# Altium PCB Controller-Board-Rev2.PcbDoc
Units mm, origin at the board's own origin, x right, y up, seen from the top; angles counter-clockwise.
Board outline 35 x 30 mm, 4 copper layers (Component Side, Ground Plane, Power Plane, Solder Side), stack 0.844 mm thick; 52 components, 56 nets, 236 pads, 62 vias.
Unrouted connection lines stored in the file: 54.
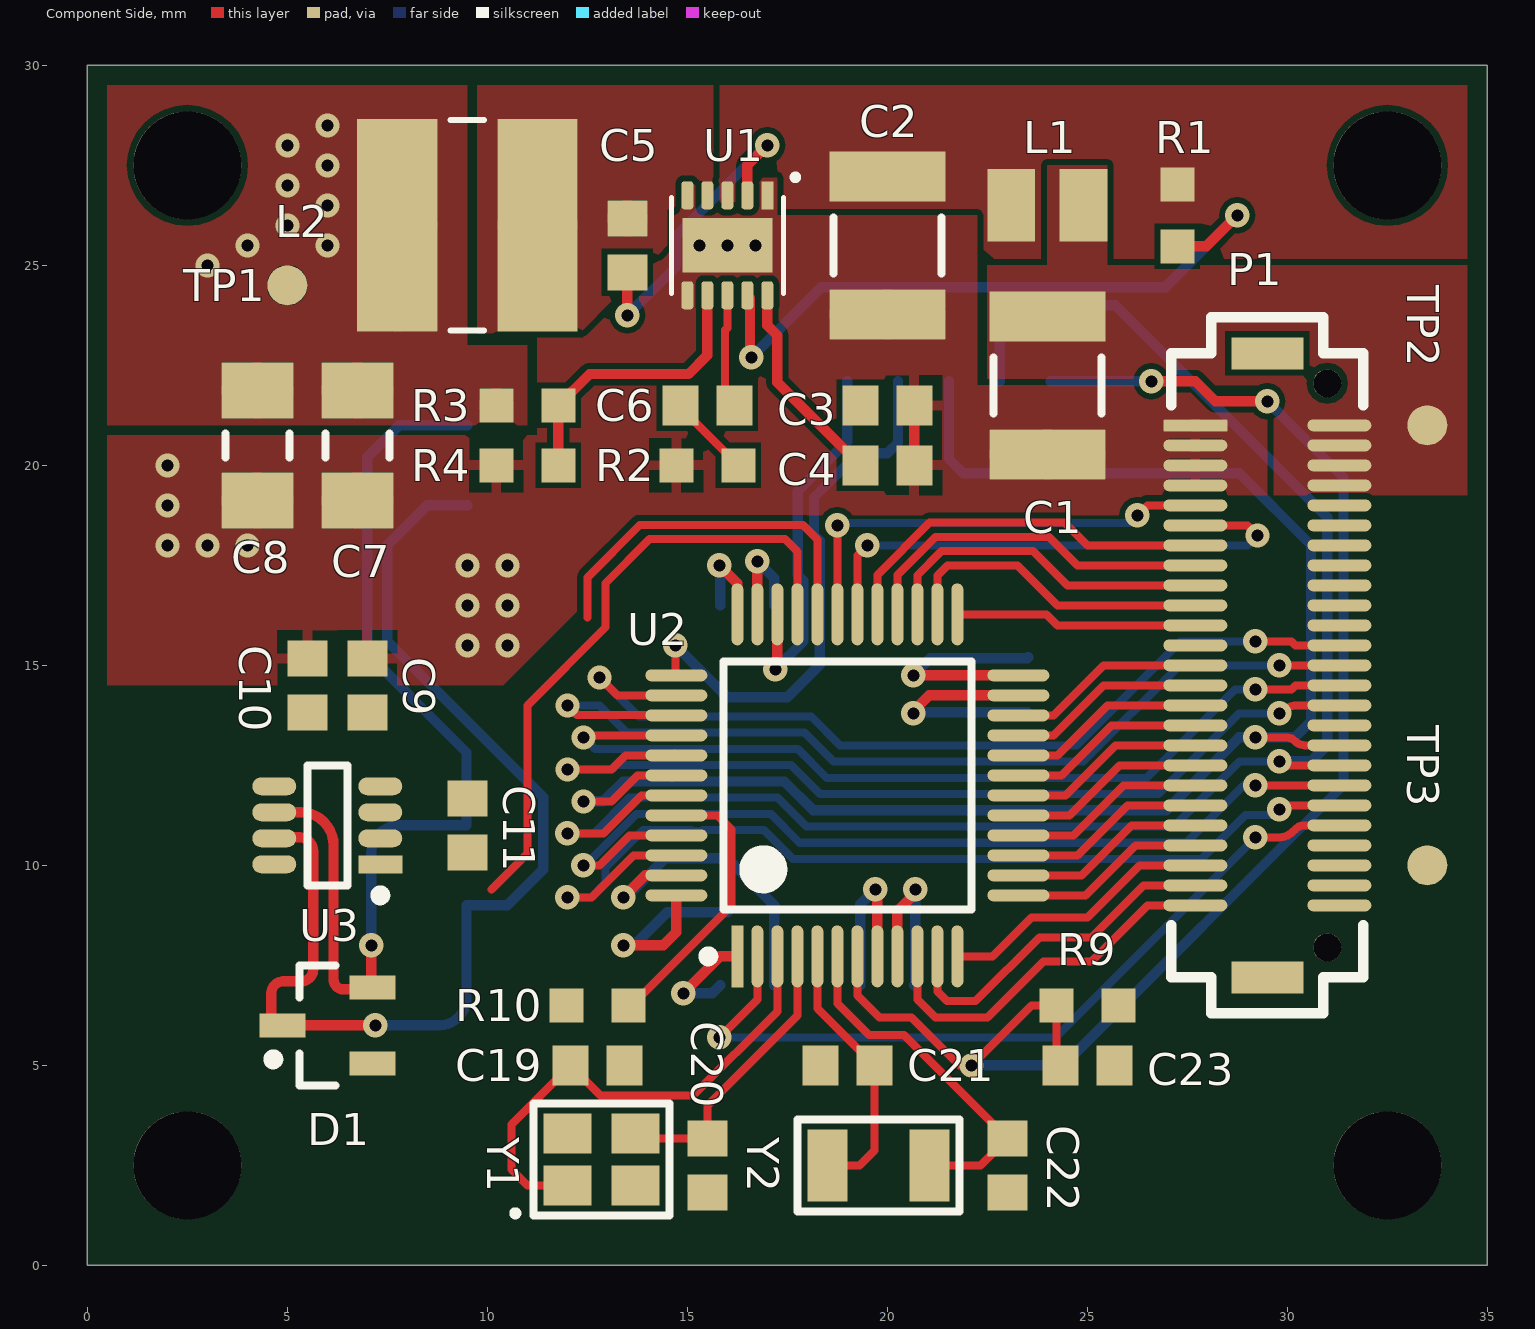
[diagram p0: Component Side view]
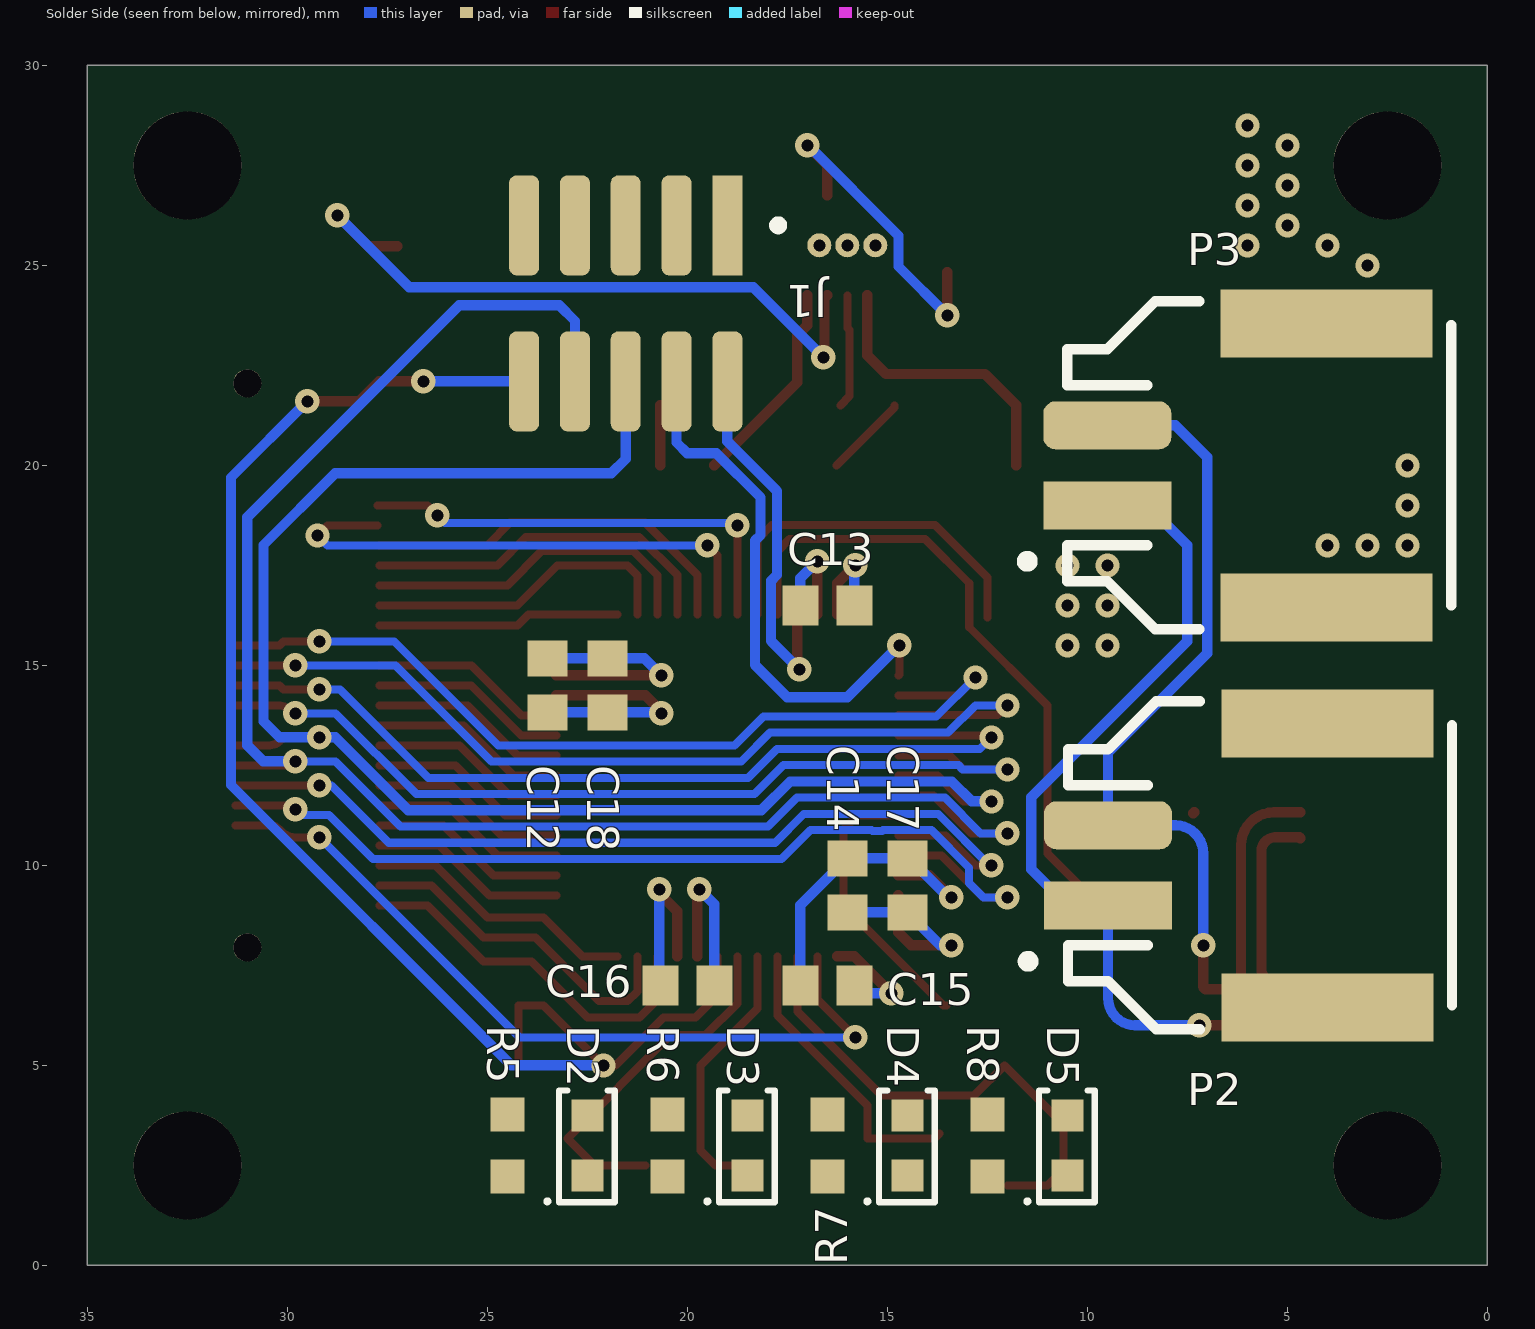
[diagram p1: Solder Side view, seen from below]
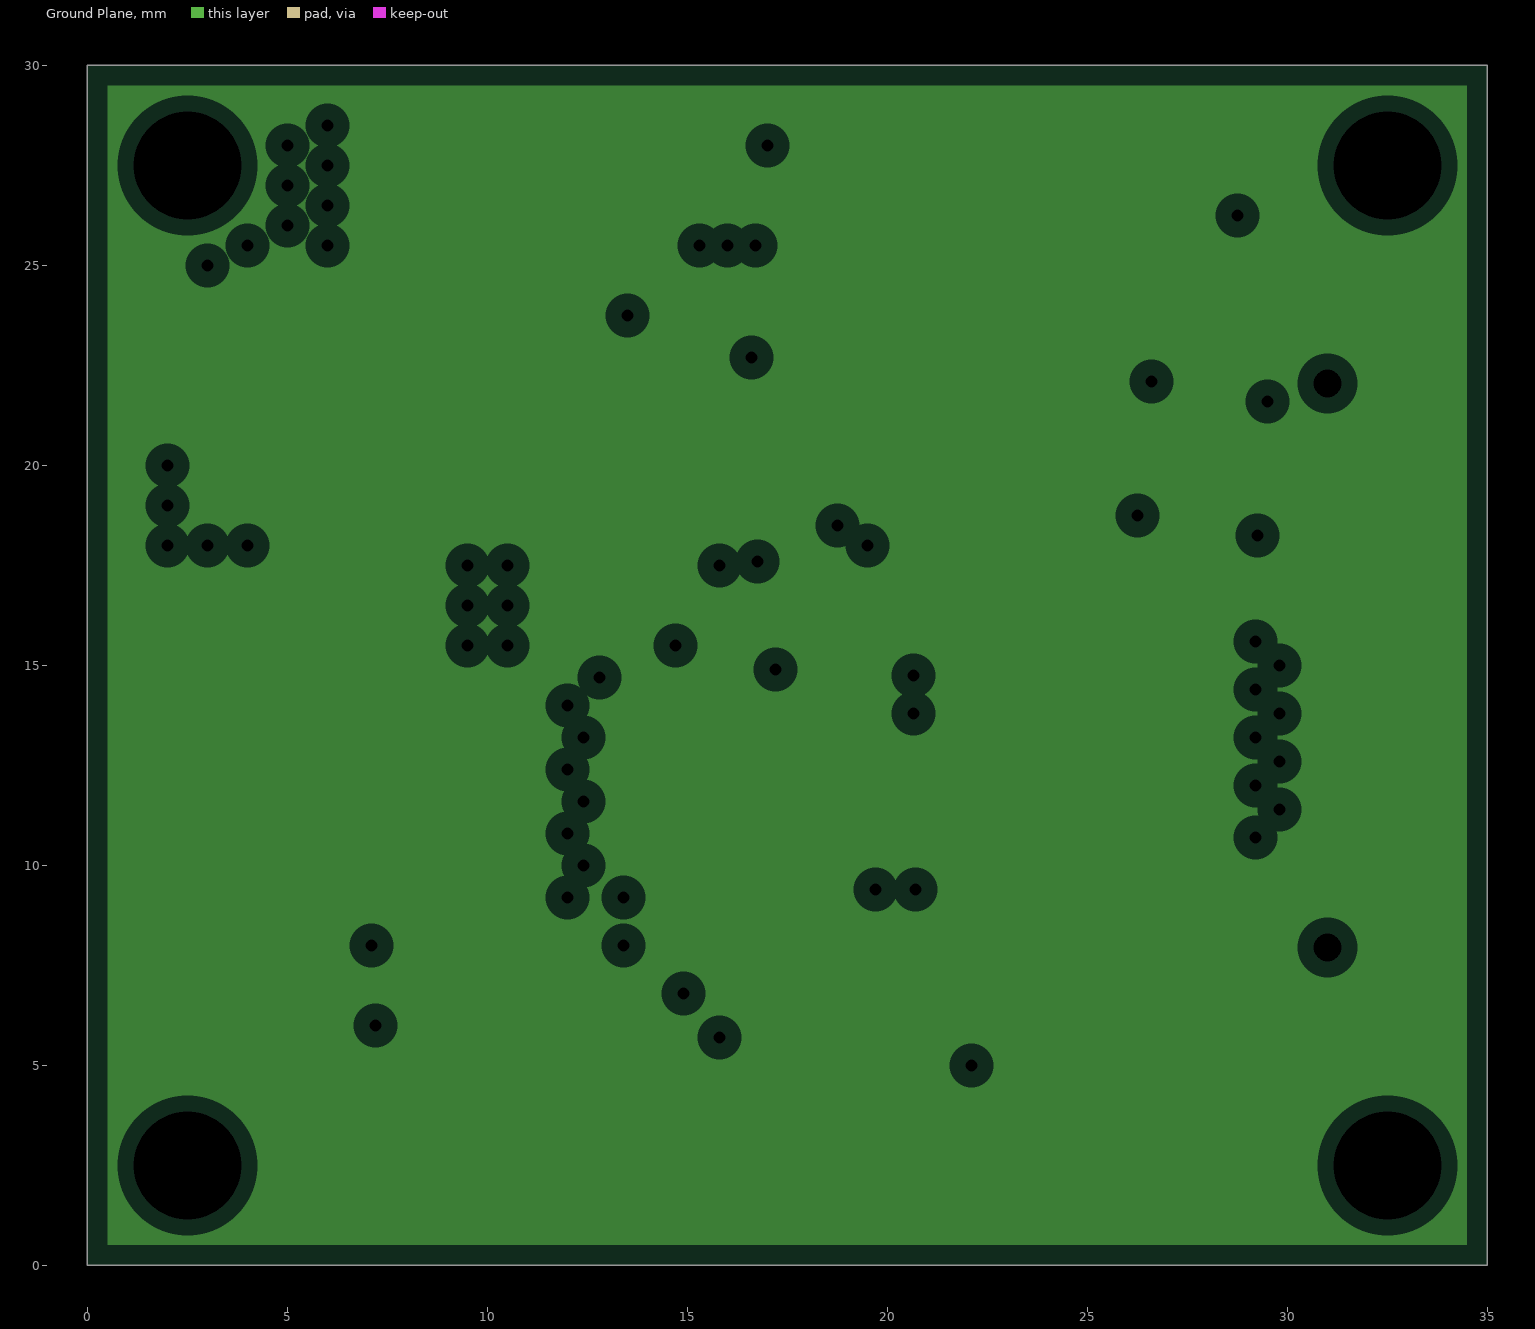
[diagram p2: Ground Plane, clearances drawn from the general rule]
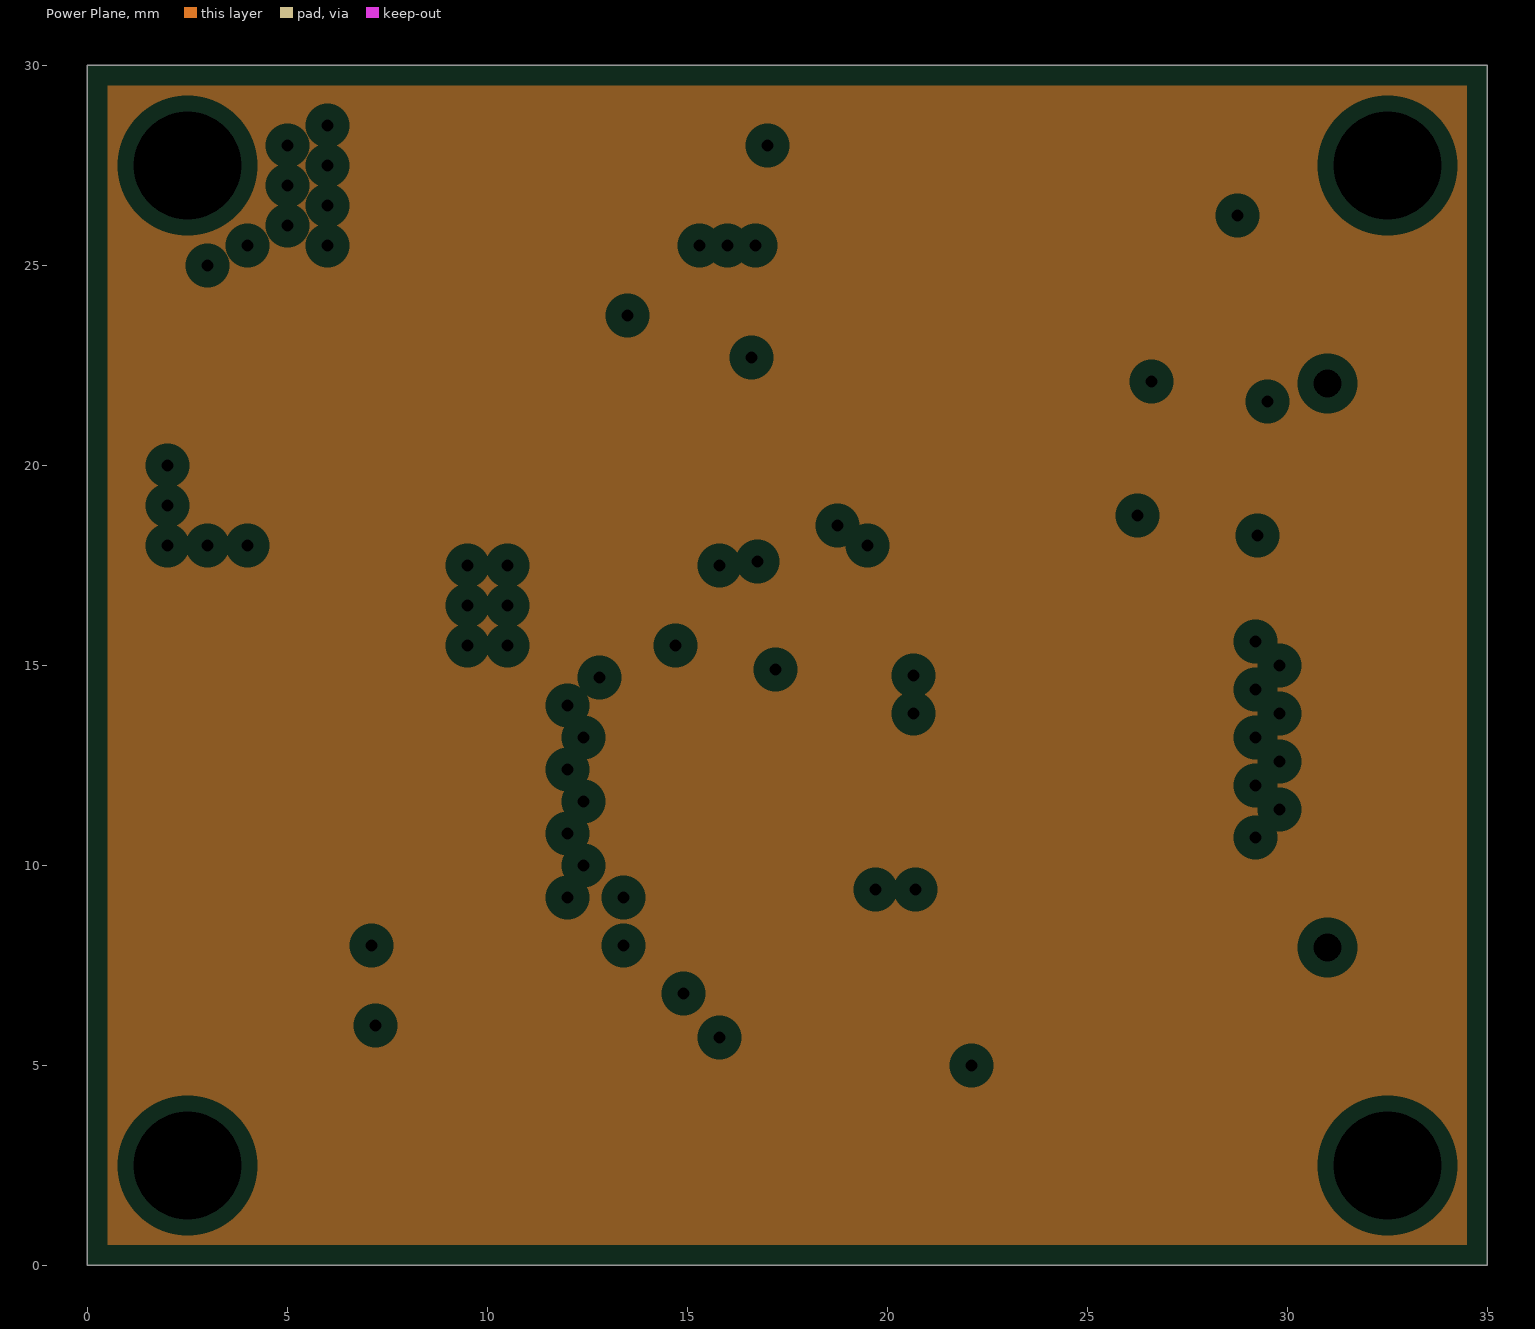
[diagram p3: Power Plane, clearances drawn from the general rule]
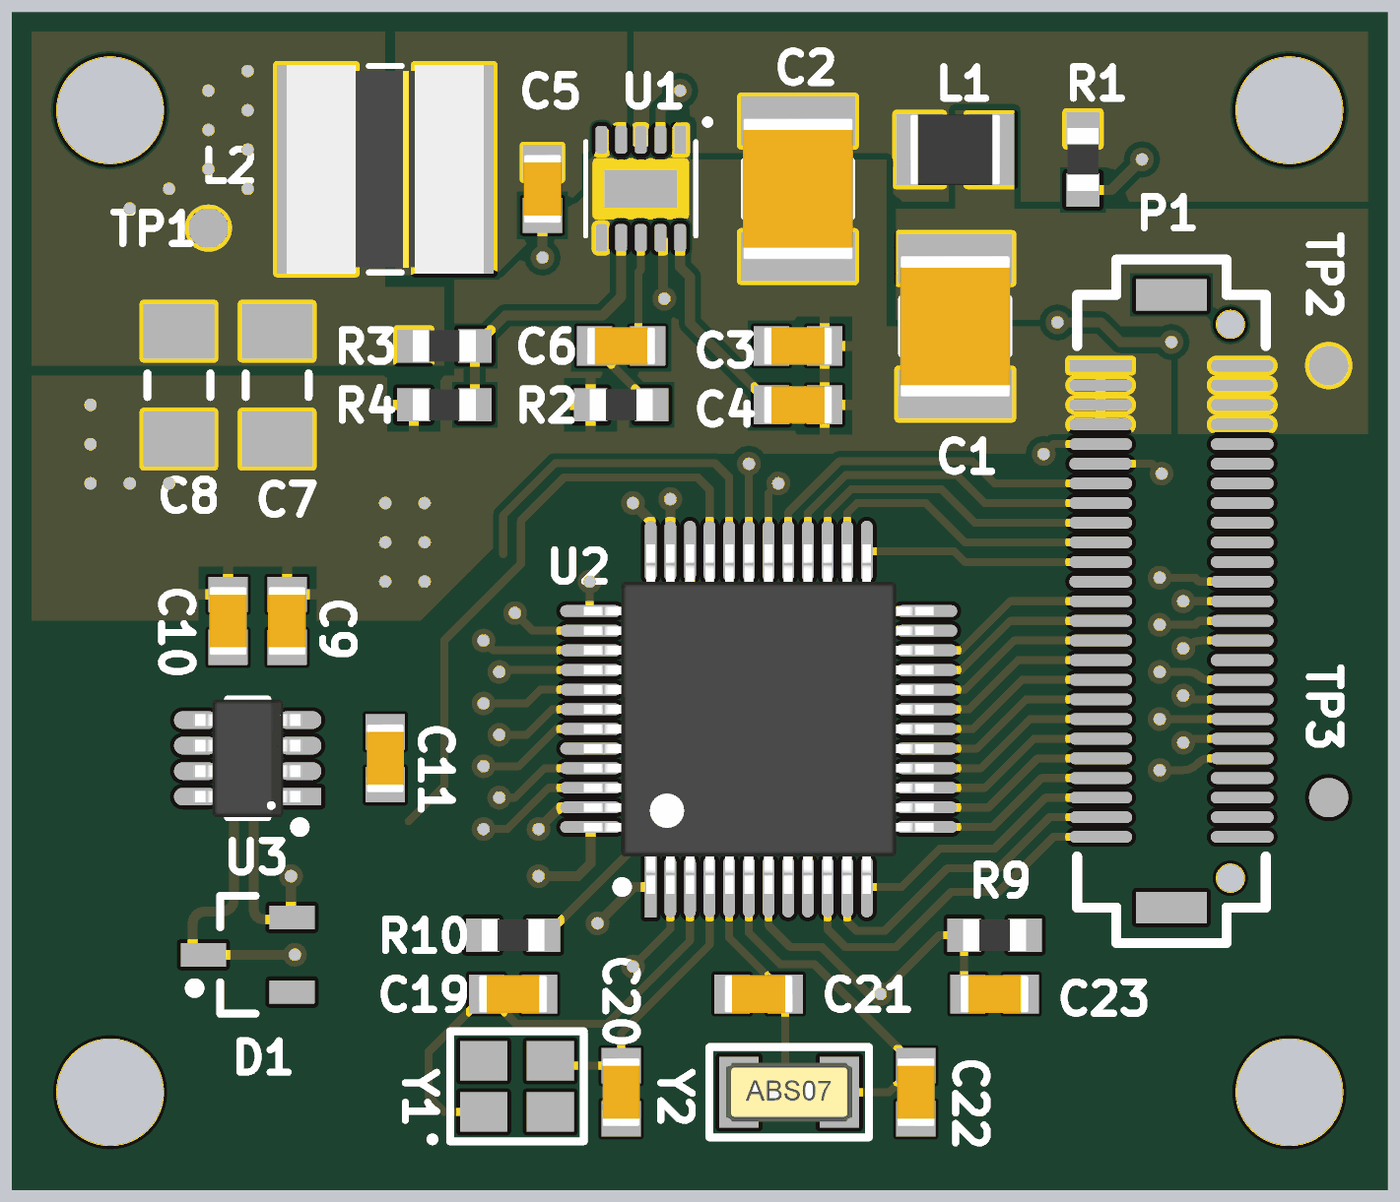
[diagram p4: 3D render of the assembled board from above, using the file's embedded part models]
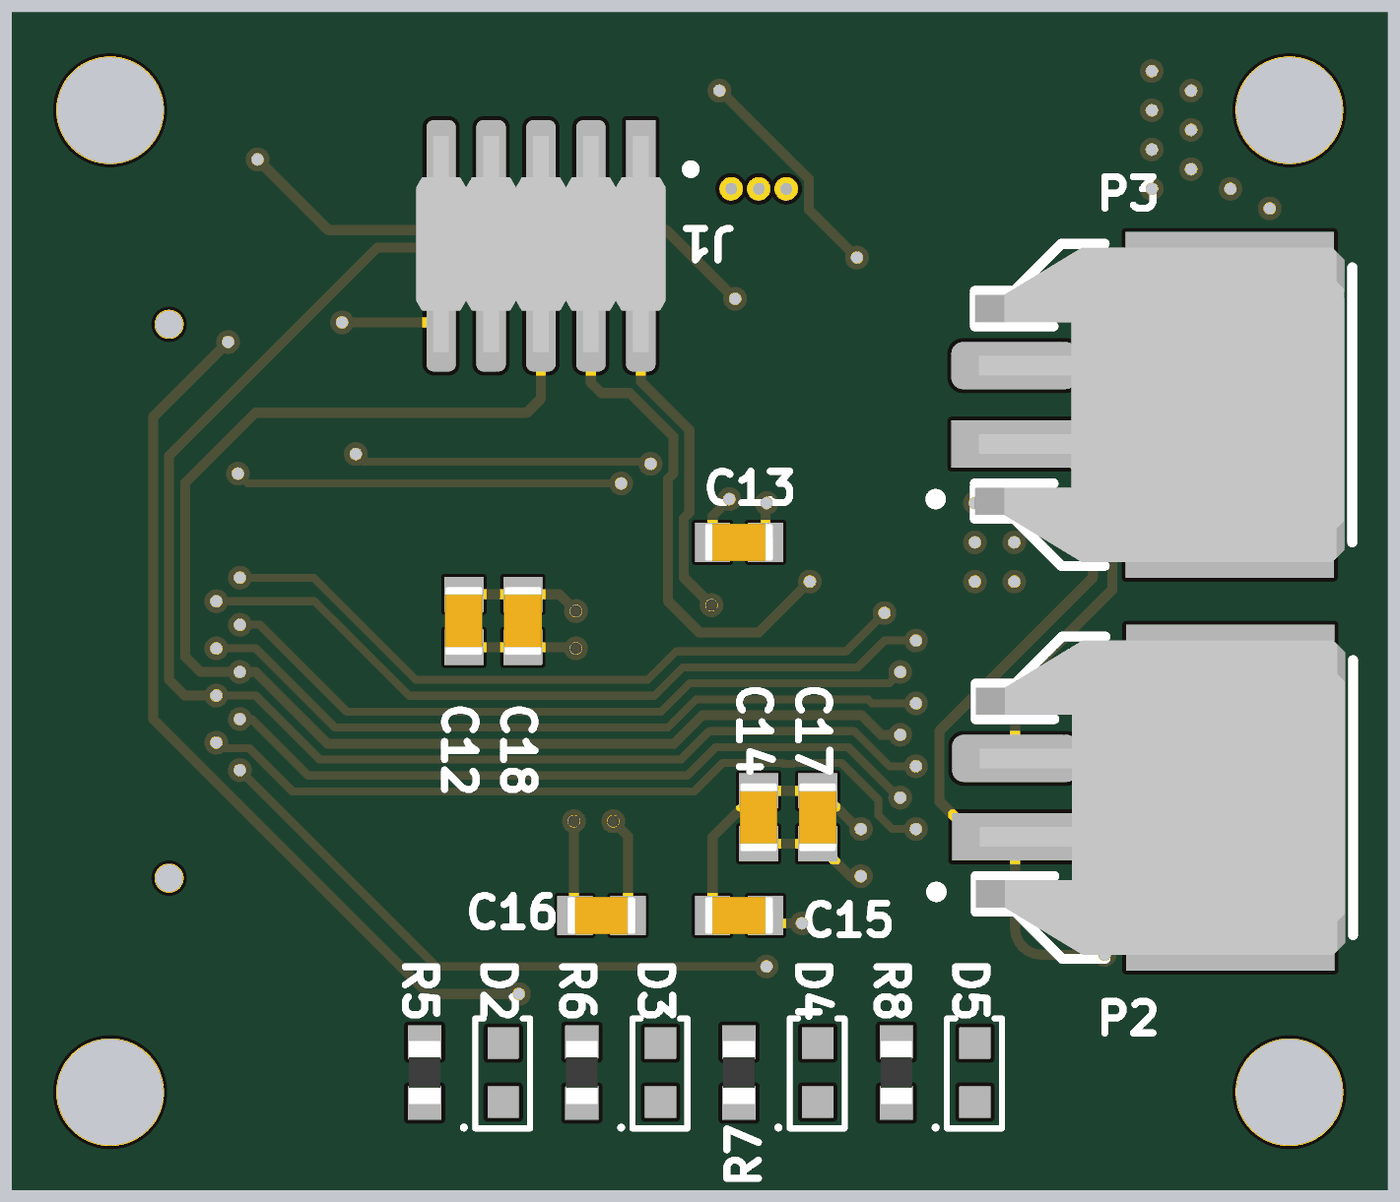
[diagram p5: 3D render of the assembled board from below, using the file's embedded part models]

## Layer stack, top to bottom
Top Solder: solder mask 0.0102, Solder Resist, Dk 3.5
Component Side: signal copper 0.0356
Dielectric 1: core 0.32, FR-4, Dk 4.8
Ground Plane: plane copper 0.036
Dielectric 3: prepreg 0.127, Dk 4.2
Power Plane: plane copper 0.036
Dielectric 4: core 0.254, Dk 4.2
Solder Side: signal copper 0.0356
Bottom Solder: solder mask 0.0102, Solder Resist, Dk 3.5

## Board outline
0,0 35,0 35,30 0,30

## Design rules (kind name [scope] priority, off if disabled: settings)
Clearance [All] p1: gap=0.152
DiffPairsRouting [All] p1: maxlimit=0.254 minlimit=0.254 mostfreqgap=0.254 toplayer_minwidth=0.254 toplayer_maxwidth=0.381 toplayer_prefwidth=0.254 bottomlayer_minwidth=0.254 bottomlayer_maxwidth=0.381 bottomlayer_prefwidth=0.254 maxuncoupledlength=25
PlaneClearance [All] p1: clearance=0.4
PlaneConnect [All] p1: planeconnectstyle=Direct reliefexpansion=0 reliefentries=4 reliefconductorwidth=0.254 reliefairgap=0.254
PolygonConnect [HasFootprint('10-UFDFN') vs IsNamedPolygon('TOP_GND_1')] p1: connectstyle=Direct reliefconductorwidth=0.254 reliefentries=4 polygonreliefangle="90 Angle" airgapwidth=0.254
PolygonConnect PolygonConnect_12V [InNet('12V')   OR InNet('12V_IN')] p2: connectstyle=Direct reliefconductorwidth=0.254 reliefentries=4 polygonreliefangle="90 Angle" airgapwidth=0.254
PolygonConnect PolygonConnect_GND_Via [IsVia vs InNet('GND')] p3: connectstyle=Direct reliefconductorwidth=0.254 reliefentries=4 polygonreliefangle="90 Angle" airgapwidth=0.254
PolygonConnect PolygonConnect_3V3_Via [IsVia vs InNet('3V3')] p4: connectstyle=Direct reliefconductorwidth=0.254 reliefentries=4 polygonreliefangle="90 Angle" airgapwidth=0.254
PolygonConnect PolygonConnect_Capacitor_GND_Pad [InNet('GND') vs HasFootprint('CAPC1608X06N')] p5: connectstyle=Relief reliefconductorwidth=0.254 reliefentries=4 polygonreliefangle="90 Angle" airgapwidth=0.254
PolygonConnect PolygonConnect_Resistor_GND_Pad [InNet('GND') vs HasFootprint('RESC1608X06N')] p6: connectstyle=Relief reliefconductorwidth=0.254 reliefentries=4 polygonreliefangle="90 Angle" airgapwidth=0.254
RoutingVias [All] p1: holewidth=0.3 width=0.605 viastyle="Through Hole" minholewidth=0.3 minwidth=0.605 maxholewidth=6.3 maxwidth=6.605
SolderMaskExpansion [All] p1: expansion=0.102
Width [All] p1: maxlimit=1.27 minlimit=0.152 preferedwidth=0.203
27 further rules are at their usual default settings.

## Classes and differential pairs
component class Controller_Board_Power_Supply: C1 C2 C3 C4 C5 C6 C7 C8 L1 L2 R1 R2 R3 R4 TP1 TP2 TP3 U1
differential pair CAN: +CAN_P -CAN_N

## Components (designator, comment, footprint, x,y, rotation, side; value= is the part's Value field where it differs from the comment)
C1 "22uF" CAPC3225X28M 24,22 r90 top
C2 "22uF" CAPC3225X28M 20,25.5 r90 top
C3 "0.1uF" CAPC1608X06N 20,21.5 r180 top
C4 "0.1uF" CAPC1608X06N 20,20 r0 top
C5 "10nF" CAPC1608X06N 13.5,25.5 r90 top
C6 "6800pF" CAPC1608X06N 15.5,21.5 r0 top
C7 "22uF" CAPC3216X18N 6.75,20.5 r90 top
C8 "22uF" CAPC3216X18N 4.25,20.5 r90 top
C9 "10uF" CAPC1608X06N 7,14.5 r270 top
C10 "4.7uF" CAPC1608X06N 5.5,14.5 r270 top
C11 "0.1uF" CAPC1608X06N 9.5,11 r90 top
C12 "0.1uF" CAPC1608X06N 23.5,14.5 r90 bottom
C13 "0.1uF" CAPC1608X06N 16.5,16.5 r180 bottom
C14 "0.1uF" CAPC1608X06N 16,9.5 r270 bottom
C15 "0.1uF" CAPC1608X06N 20,7 r0 bottom
C16 "0.1uF" CAPC1608X06N 16.5,7 r180 bottom
C17 "4.7uF" CAPC1608X06N 14.5,9.5 r270 bottom
C18 "4.7uF" CAPC1608X06N 22,14.5 r90 bottom
C19 "15pF" CAPC1608X06N 12.75,5 r180 top
C20 "15pF" CAPC1608X06N 15.5,2.5 r90 top
C21 "15pF" CAPC1608X06N 19,5 r0 top
C22 "15pF" CAPC1608X06N 23,2.5 r90 top
C23 "0.1uF" CAPC1608X06N 25,5 r180 top
D1 "TVS Diode" SOT23 6,6 r180 top
D2 "Blue" DIOC1608X06N 22.5,3 r90 bottom
D3 "Blue" DIOC1608X06N 18.5,3 r90 bottom
D4 "Green" DIOC1608X06N 14.5,3 r90 bottom
D5 "Red" DIOC1608X06N 10.5,3 r90 bottom
J1 "10 Position 0.05\" Header Surface Mount" "10 POS 1.27MM RECT CONN" 19,26 r0 bottom
L1 "560nH" INDC2116X06N 24,26.5 r180 top
L2 "15µH" IND_BOURNS_SRR40 9.5,26 r180 top
P1 "BergStak Receptacle" "Bergstak 50 Pos Receptacle" 29.5,15 r0 top
P2 "CAN" "2 POS Dura-Click" 9.48,9 r90 bottom
P3 "CAN" "2 POS Dura-Click" 9.5,19 r90 bottom
R1 "100K" RESC1608X06N 27.25,26.25 r270 top
R2 "6.8k" RESC1608X06N 15.5,20 r0 top
R3 "26.1K" RESC1608X06N 11,21.5 r180 top
R4 "10K" RESC1608X06N 11,20 r0 top
R5 "510R" RESC1608X06N 24.5,3 r90 bottom
R6 "510R" RESC1608X06N 20.5,3 r90 bottom
R7 "510R" RESC1608X06N 16.5,3 r90 bottom
R8 "510R" RESC1608X06N 12.5,3 r90 bottom
R9 "100K" RESC1608X06N 25,6.5 r0 top
R10 "510R" RESC1608X06N 12.75,6.5 r0 top
TP1 "Test Point" "Test Point" 5,24.5 r90 top
TP2 "Test Point" "Test Point" 33.5,21 r90 top
TP3 "Test Point" "Test Point" 33.5,10 r90 top
U1 "AP65200FK-7 Buck Switching Regulator" 10-UFDFN 16,25.5 r180 top
U2 "STM32F072CBT6_QFP" TSQFP50P890X890X160-48M 19,12 r90 top
U3 "TCAN332DR CAN Transceiver_SOT" TSOP65P280X145-8N 6,11 r180 top
Y1 "CRYSTAL 32 MHz 4-SMD" "CX2520DB CRYSTAL" 12,2 r0 top
Y2 "32.768 kHz" "ABS07AIG CRYSTAL" 18.5,2.5 r0 top

## Footprints (in the part's own frame and the unit in brackets; to place one, negate y for a bottom-side part, rotate by r counter-clockwise, add the part's x,y. Pads: shape width x height; smd on the part's side, far side on the other; paste and mask are expansions set on the pad)
"2 POS Dura-Click" [mm] "WM7169CT-ND"
  rect 1.2x3.2 smd: 1(0,0)
  rrect50% 1.2x3.2 smd: 2(2,0)
  rect 1.7x5.3 smd: ""(-2.55,-5.48) ""(4.55,-5.48)
  silkscreen extent -3.1,-8.6 5.1,2.13, body extent -3,-8.4 5,1, height 6.39
"10 POS 1.27MM RECT CONN" [mm] "Amphenol 10 Positions Header Connector 0.050\" (1.27mm) Surface Mount Gold"
  rect 0.75x2.5 smd: 1(0,0)
  rrect50% 0.75x2.5 smd: 2(0,3.9) 3(1.27,0) 4(1.27,3.9) 5(2.54,0) 6(2.54,3.9) 7(3.81,0) 8(3.81,3.9) 9(5.08,0) 10(5.08,3.9)
  silkscreen extent -1.37,-0.1 -1.17,0.1, body extent -0.64,-0.84 5.72,4.65, height 4.5
10-UFDFN [mm]
  rect 0.3x0.7 smd: 1(-1,-1.25)
  rrect50% 0.3x0.7 smd: 2(-0.5,-1.25) 3(0,-1.25) 4(0.5,-1.25) 5(1,-1.25) 6(1,1.25) 7(0.5,1.25) 8(0,1.25) 9(-0.5,1.25) 10(-1,1.25)
  round 0.6 hole 0.3: 11(-0.7,0) 11(0,0) 11(0.7,0)
  rect 2.25x1.36 smd paste-0.2: 11(0,0)
  silkscreen extent -1.77,-1.77 1.4,1.2, body extent -1.27,-1.27 1.28,1.28, height 0.6
"ABS07AIG CRYSTAL" [mm]
  rect 1x1.8 smd: 1(0,0) 2(2.55,0)
  silkscreen extent -0.75,-1.15 3.3,1.15, body extent -0.33,-0.75 2.88,0.75, height 0.89
"Bergstak 50 Pos Receptacle" [mm] "Bergstak 50 Position Receptacle"
  rect 1.6x0.3 smd: 1(-1.8,6)
  oval 1.6x0.3 smd: 2(-1.8,5.5) 3(-1.8,5) 4(-1.8,4.5) 5(-1.8,4) 6(-1.8,3.5) 7(-1.8,3) 8(-1.8,2.5) 9(-1.8,2) 10(-1.8,1.5) 11(-1.8,1) 12(-1.8,0.5) 13(-1.8,0) 14(-1.8,-0.5) 15(-1.8,-1) 16(-1.8,-1.5) 17(-1.8,-2) 18(-1.8,-2.5) 19(-1.8,-3) 20(-1.8,-3.5) 21(-1.8,-4) 22(-1.8,-4.5) 23(-1.8,-5) 24(-1.8,-5.5) 25(-1.8,-6) 26(1.8,-6) 27(1.8,-5.5) 28(1.8,-5) 29(1.8,-4.5) 30(1.8,-4) 31(1.8,-3.5) 32(1.8,-3) 33(1.8,-2.5) 34(1.8,-2) 35(1.8,-1.5) 36(1.8,-1) 37(1.8,-0.5) 38(1.8,0) 39(1.8,0.5) 40(1.8,1) 41(1.8,1.5) 42(1.8,2) 43(1.8,2.5) 44(1.8,3) 45(1.8,3.5) 46(1.8,4) 47(1.8,4.5) 48(1.8,5) 49(1.8,5.5) 50(1.8,6)
  rect 1.8x0.8 smd: ""(0,-7.8) ""(0,7.8)
  round 0.7 hole 0.7: ""(1.5,-7.05) ""(1.5,7.05)
  silkscreen extent -2.4,-8.7 2.4,8.7
CAPC1608X06N [mm] "Chip Capacitor, 2-Leads, Body 1.60x0.81mm, IPC Medium Density"
  rect 0.9x1 smd mask+0.076: 1(-0.675,0) 2(0.675,0)
  body extent -0.87,-0.48 0.87,0.48, height 0.9
CAPC3216X18N [mm] "Chip Capacitor, 2-Leads, Body 3.20x1.60mm, IPC Medium Density"
  rect 1.4x1.8 smd: 1(-1.375,0) 2(1.375,0)
  silkscreen extent -0.3,-0.8 0.3,0.8, body extent -1.68,-0.87 1.67,0.87, height 1.8
CAPC3225X28M [mm] "Chip Capacitor, 2-Leads, Body 3.20x2.50mm, IPC Low Density"
  rect 1.25x2.9 smd: 1(-1.725,0) 2(1.725,0)
  silkscreen extent -0.7,-1.35 0.7,1.35, body extent -1.8,-1.4 1.8,1.4, height 2.8
"CX2520DB CRYSTAL" [mm]
  rect 1.2x1 smd: 1(0,0) 2(1.7,0) 3(1.7,1.3) 4(0,1.3)
  silkscreen extent -1.35,-0.75 2.55,2.05, body extent -0.4,-0.35 2.1,1.65, height 0.5
DIOC1608X06N [mm] "Chip Diode, 2-Leads, Body 1.60x0.80mm, IPC Medium Density"
  rect 0.8x0.8 smd: 1(-0.75,0) 2(0.75,0)
  silkscreen extent -1.45,-0.69 1.38,1.05, body extent -0.8,-0.4 0.8,0.4, height 0.8
IND_BOURNS_SRR40 [mil]
  rect 79x209 smd: 1(-69,0) 2(69,0)
  silkscreen extent -16,-104 16,103, body extent -99,-105 99,105, height 79
INDC2116X06N [mm] "Chip Inductor, 2-Leads, Body 2.10x1.60mm, IPC Medium Density"
  rect 1.19x1.82 smd: 1(-0.905,0) 2(0.905,0)
  body extent -1.15,-0.9 1.15,0.9, height 0.6
RESC1608X06N [mm] "Chip Resistor, 2-Leads, Body 1.60x0.80mm, IPC Medium Density"
  rect 0.85x0.85 smd: 1(-0.775,0) 2(0.775,0)
  body extent -0.8,-0.4 0.8,0.4, height 0.55
SOT23 [mm] "SOT23, 3-Leads, Body 2.9x1.3mm, Pitch 0.95mm, Lead Span 2.3mm - Reverse Pinning, IPC Medium Density"
  rect 1.15x0.6 smd: 1(1.125,0) 2(-1.125,-0.95) 3(-1.125,0.95)
  silkscreen extent -0.2,-1.5 1.47,1.5, body extent -0.7,-1.5 0.7,1.5, height 1.1
"Test Point" [mm]
  round 1 smd: TP(0,0)
TSOP65P280X145-8N [mm] "TSOP, 8-Leads, Body 2.90x1.60mm, Pitch 0.65mm, IPC Medium Density"
  rect 1.1x0.45 smd: 1(-1.325,0.975)
  oval 1.1x0.45 smd: 2(-1.325,0.325) 3(-1.325,-0.325) 4(-1.325,-0.975) 5(1.325,-0.975) 6(1.325,-0.325) 7(1.325,0.325) 8(1.325,0.975)
  silkscreen extent -1.45,-1.5 0.5,1.87, body extent -1.39,-1.5 1.39,1.5, height 1.45
TSQFP50P890X890X160-48M [mm] "TSQFP, 48-Leads, Body 7.00x7.00mm, Pitch 0.50mm, IPC Low Density"
  rect 1.55x0.3 smd: 1(-4.275,2.75)
  oval 1.55x0.3 smd: 2(-4.275,2.25) 3(-4.275,1.75) 4(-4.275,1.25) 5(-4.275,0.75) 6(-4.275,0.25) 7(-4.275,-0.25) 8(-4.275,-0.75) 9(-4.275,-1.25) 10(-4.275,-1.75) 11(-4.275,-2.25) 12(-4.275,-2.75) 25(4.275,-2.75) 26(4.275,-2.25) 27(4.275,-1.75) 28(4.275,-1.25) 29(4.275,-0.75) 30(4.275,-0.25) 31(4.275,0.25) 32(4.275,0.75) 33(4.275,1.25) 34(4.275,1.75) 35(4.275,2.25) 36(4.275,2.75)
  oval 0.3x1.55 smd: 13(-2.75,-4.275) 14(-2.25,-4.275) 15(-1.75,-4.275) 16(-1.25,-4.275) 17(-0.75,-4.275) 18(-0.25,-4.275) 19(0.25,-4.275) 20(0.75,-4.275) 21(1.25,-4.275) 22(1.75,-4.275) 23(2.25,-4.275) 24(2.75,-4.275) 37(2.75,4.275) 38(2.25,4.275) 39(1.75,4.275) 40(1.25,4.275) 41(0.75,4.275) 42(0.25,4.275) 43(-0.25,4.275) 44(-0.75,4.275) 45(-1.25,4.275) 46(-1.75,4.275) 47(-2.25,4.275) 48(-2.75,4.275)
  silkscreen extent -4.4,-3.1 3.1,3.6, body extent -4.45,-4.45 4.45,4.45, height 1.6

## Part data
C1 C2: library part "CAP CER 22UF 16V X5R 1210", "22µF ±20% 16V Ceramic Capacitor X5R 1210 (3225 Metric)"
C3 C4 C11 C12 C13 C14 C15 C16 C23: library part "CAP CER 0.1UF 50V 10% X7R 0603", "0.10µF ±10% 50V Ceramic Capacitor X7R 0603 (1608 Metric)"
C5: library part "CAP CER 10nF 50V 5% X7R 0603", "10000pF ±5% 50V Ceramic Capacitor U2J 0603 (1608 Metric)"
C6: library part "CAP CER 6800pF 50V 10% X7R 0603", "6800pF ±10% 50V Ceramic Capacitor X7R 0603 (1608 Metric)"
C7 C8: library part "CAP CER 22UF 6.3V X7R 1206", "22µF ±10% 6.3V Ceramic Capacitor X7R 1206 (3216 Metric)"
C9: library part "CAP CER 10uF 25V 20% X5R 0603", "10µF ±20% 25V Ceramic Capacitor X5R 0603 (1608 Metric)"
C10 C17 C18: library part "CAP CER 4.7UF 25V 10% X5R 0603", "4.7µF ±10% 25V Ceramic Capacitor X5R 0603 (1608 Metric)"
C19 C20 C21 C22: library part "CAP CER 15PF 50V NPO 0603", "15pF ±5% 50V Ceramic Capacitor C0G, NP0 0603 (1608 Metric)"
D1: "TVS DIODE 24VWM 70VC SOT23"
D2 D3: library part LED_BLUE, "LED BLUE CLEAR 0603 SMD"
D4: library part LED_GREEN, "LED GREEN CLEAR 0603 SMD"
D5: library part LED_RED, "Red LED 0603"
J1: "10 Positions Header Connector 0.050\" (1.27mm) Surface Mount Gold"
L1: library part "IND 560NH 2.1A 80 MOHM SMD", "560nH Shielded Multilayer Inductor 2.1A 80 mOhm Max 0806 (2016 Metric)"
L2: library part "IND 15UH 1.03A 220 MOHM", "15µH Shielded Wirewound Inductor 1.03A 220 mOhm Max 1919 (4848 Metric)"
P1: library part "BergStak 50 Position Connector Receptacle", "50 Position Connector Receptacle, Center Strip Contacts Surface Mount Gold"
P2 P3: library part "2 Position DuraClik CAN Connector", "2 Positions Header, Shrouded Connector 0.079\" (2.00mm) Surface Mount, Right Angle Tin"
R1 R9: library part "RES 100K OHM 1/8W 5% 0603 SMD", "RES SMD 100K OHM 5% 1/10W 0603"
R2: library part "RES 6.8k OHM 1% 1/10W 0603 SMD", "RES SMD 6.8K OHM 1% 1/10W 0603"
R3: library part "RES 26.1K OHM 1/10W 1% 0603 SMD", "RES SMD 26.1K OHM 1% 1/10W 0603"
R4: library part "RES SMD 10K OHM 1% 1/10W 0603", "RES SMD 10K OHM 1% 1/10W 0603"
R5 R6 R7 R8 R10: library part "RES 510 OHM 1/10W 0603 SMD", "RES SMD 510 OHM 5% 1/10W 0603"
U1: "Buck Switching Reg IC Positive Adjustable 0.925V 1 Output 2A 10-UFDFN Exposed Pad"
U3: "1/1 Transceiver CAN 8-SOIC"
Y1: "32MHz ±15ppm Crystal 8pF 50 Ohm -40°C ~ 85°C AEC-Q200 Surface Mount 4-SMD, No Lead"
Y2: library part "CRYSTAL 32.768KHZ 9PF 2-SMD", "32.768kHz ±20ppm Crystal 6pF 50 kOhm -40°C ~ 85°C Surface Mount 4-SOJ, 5.50mm pitch"

## Free pads (board coordinates)
  round 2.7 hole 2.7: ""(2.5,2.5) ""(2.5,27.5) ""(32.5,2.5) ""(32.5,27.5)

## Via types
v1: diameter 0.605, hole 0.3, Component Side to Solder Side, tented both sides, 35 vias
v2: diameter 0.6, hole 0.3, Component Side to Solder Side, tented both sides, 27 vias

## Nets (pads, with @x,y where several pads share a name; then routed paths per layer and width w, separated by ;. In a path a pad name is that pad's centre, name@x,y a point inside that pad or via, vN(x,y) a via of type N, cw(c..) or ccw(c..) an arc to the next point about the centre after c; other vN are vias at no path point)
3V3: C7.2 C8.2 C9.2 C10.2 C11.2 C12.2 C13.2 C14.2 C15.2 C16.2 C17.2 C18.2 J1.1 L2.2 P1.40 P1.41 P1.42 P1.43 P1.44 P1.45 R3.2 R5.1 R6.1 R7.1 R8.1 R9.2 TP1.TP U2.1 U2.9 U2.24 U2.36 U2.48 U3.3 | length 20.6
  Component Side w0.254: U3.3 U3.3@7.35,11.3 ; v1(13.4,8) 14.4,8 14.725,8.325 U2.48 ; v1(14.9,6.8) 15.825,7.725 U2.1 ; v1(15.8,17.5) 16.25,17.05 U2.36 ; U2.9 20.25,8.85 20.7,9.3 v1(20.7,9.4) ; v1(20.65,14.75) U2.24
  Solder Side w0.254: v1(13.4,8) 13.675,8 C17.2 C14.2 ; v1(14.9,6.8) 15.625,6.8 C16.2 ; C13.2 v1@15.825,17.625 ; v1(20.65,14.75) 21.075,15.175 C18.2 C12.2 C12.2@23.525,15.2 ; C15.2 20.7,7.025 v1(20.7,9.4)
  other v2: 3,25 4,25.5 6,25.5 5,26 6,26.5 5,27 6,27.5 5,28 6,28.5
12V: C1.2 L1.1 P1.47 P1.48 P1.49 P1.50 TP2.TP
12V_IN: C2.2 C3.2 L1.2 R1.1 U1.3
BOOT0: R10.2 U2.44 | length 7
  Component Side w0.203: R10.2 13.6,6.5 16.1,9 16.1,10.9 15.75,11.25 U2.44
BST: C5.1 U1.2 | length 8.2
  Component Side w0.254: v1(13.5,23.75) C5.1 ; U1.2 16.5,27.5 v1(17,28)
  Solder Side w0.254: v1(13.5,23.75) 14.721,24.971 14.721,25.74 16.981,28 v1(17,28)
CAN_N: D1.2 P2.2 P3.2 U3.6 | length 25.6
  Component Side w0.254: U3.6 5.335,11.325 cw(c5.335,10.503) 6.157,10.503 6.157,7.143 ccw(c6.4,7.143) 6.4,6.9 7.025,6.9 ccw(c7.025,6.975) 7.1,6.975 v1(7.1,8)
  Solder Side w0.254: v1(7.1,8) 7.1,10.3 cw(c7.8,10.3) 7.8,11 P2.2 9.48,12.82 7,15.3 7,20.2 7.8,21 P3.2
CAN_P: D1.1 P2.1 P3.1 U3.7 | length 28.3
  Component Side w0.254: U3.7 cw(c4.7,10.675) 4.7,10.7 5.3,10.7 cw(c5.3,10.351) 5.649,10.351 5.649,7.4 cw(c5.349,7.4) 5.349,7.1 4.9,7.1 ccw(c4.9,6.8) 4.6,6.8 4.6,6 D1.1 v1(7.2,6)
  Solder Side w0.254: v1(7.2,6) 8.8,6 ccw(c8.8,6.68) 9.48,6.68 P2.1 10.5,9 11.4,9.9 11.4,11.7 7.5,15.6 7.5,18 8.5,19 P3.1
COMP: C6.2 U1.8 | length 2.9
  Component Side w0.203: U1.8 16,23.437 15.944,23.381 15.944,21.731 C6.2
EN: R1.2 U1.9 | length 17
  Component Side w0.254: U1.9 16.571,24.179 16.571,22.729 v1(16.6,22.7) ; R1.2 27.975,25.475 v1(28.75,26.25)
  Solder Side w0.254: v1(16.6,22.7) 18.35,24.45 26.95,24.45 v1(28.75,26.25)
FB: R3.1 R4.2 U1.7 | length 7.2
  Component Side w0.254: R4.2 R3.1 12.554,22.279 15.029,22.279 15.5,22.75 U1.7
GND: C1.1 C2.1 C3.1 C4.2 C7.1 C8.1 C9.1 C10.1 C11.1 C12.1 C13.1 C14.1 C15.1 C16.1 C17.1 C18.1 C19.1 C20.1 C21.1 C22.1 C23.1 D1.3 J1.3 J1.5 P1.1 P1.2 P1.3 P1.4 P1.26 P1.27 P1.28 P1.29 R2.1 R4.1 R10.1 TP3.TP U1.1 U1.5 U1.6 U1.11 U2.8 U2.23 U2.35 U2.47 U3.2 Y1.2 Y1.4 | length 22.4
  Component Side w0.254: v1(13.4,9.2) 13.95,9.75 U2.47 ; U2.35 v1(16.75,17.6) ; v1(19.7,9.4) 19.75,9.35 U2.8 ; v1@20.6,13.8 21.05,14.25 U2.23 ; C4.2 C3.1
  Solder Side w0.254: v1(13.4,9.2) 13.475,9.2 14.475,10.2 C17.1 C14.1 17.175,9 C16.1 ; v1(16.75,17.6) 17.175,17.175 C13.1 ; C15.1 19.325,9.025 v1(19.7,9.4) ; v1@20.6,13.8 20.625,13.825 C18.1 C12.1
  other v1: 20.65,13.8
  other v2: 9.5,15.5 10.5,15.5 9.5,16.5 10.5,16.5 9.5,17.5 10.5,17.5 2,18 3,18 4,18 2,19 2,20
NetC6_1: C6.1 R2.2 | length 2.1
  Component Side w0.203: C6.1 14.825,21.45 R2.2
NetD2_1: D2.1 R5.2
NetD3_1: D3.1 R6.2
NetD4_1: D4.1 R7.2
NetD5_1: D5.1 R8.2
NRST: C23.2 J1.10 R9.1 U2.7 | length 37.1
  Component Side w0.203: U2.7 19.25,6.75 19.8,6.2 20.6,6.2 21.8,5 v2(22.1,5) 23.6,6.5 R9.1 24.225,5.1 C23.2
  Component Side w0.254: v1(26.6,22.1) 27.7,22.1 28.2,21.6 v1(29.5,21.6)
  Solder Side w0.254: v2(22.1,5) 24.4,5 31.406,12.006 31.406,19.694 v1(29.5,21.6) ; J1.10 v1(26.6,22.1)
PA0: P1.25 U2.10 | length 9.4
  Component Side w0.203: U2.10 20.75,6.65 21.2,6.2 22.5,6.2 23.9,7.6 25.1,7.6 26.5,9 P1.25
PA1: P1.24 U2.11 | length 8.6
  Component Side w0.203: U2.11 21.25,6.85 21.492,6.608 22.208,6.608 23.8,8.2 25.1,8.2 26.4,9.5 P1.24
PA2/USART2_TX: P1.23 U2.12 | length 6.9
  Component Side w0.203: U2.12 22.625,7.725 23.6,8.7 25,8.7 26.3,10 P1.23
PA3/USART2_RX: P1.22 U2.13 | length 4.9
  Component Side w0.203: U2.13 24.95,9.25 26.2,10.5 P1.22
PA4/SPI1_NSS: P1.21 U2.14 | length 4.9
  Component Side w0.203: U2.14 24.85,9.75 26.1,11 P1.21
PA5/SPI1_SCK: P1.20 U2.15 | length 4.9
  Component Side w0.203: U2.15 24.75,10.25 26,11.5 P1.20
PA6/SPI1_MISO: P1.19 U2.16 | length 4.9
  Component Side w0.203: U2.16 24.65,10.75 25.9,12 P1.19
PA7/SPI1_MOSI: P1.18 U2.17 | length 4.9
  Component Side w0.203: U2.17 24.55,11.25 25.8,12.5 P1.18
PA8: P1.7 U2.29 | length 9.7
  Component Side w0.203: U2.29 19.75,17.258 21.058,18.566 24.434,18.566 25,18 P1.7
PA9: P1.6 U2.30 | length 13.3
  Component Side w0.203: U2.30 19.25,17.75 v1(19.5,18) ; P1.6@27.75,18.5 29,18.5 v2(29.25,18.25)
  Solder Side w0.203: v1(19.5,18) 29,18 v2(29.25,18.25)
PA10: P1.5 U2.31 | length 11.4
  Component Side w0.203: U2.31 v1(18.75,18.5) ; v1(26.25,18.75) 26.5,19 P1.5 P1.5@27.75,19
  Solder Side w0.203: v1(18.75,18.5) 18.806,18.556 26.056,18.556 v1(26.25,18.75)
PA11/CAN_RX: U2.32 U3.4 | length 9.3
  Component Side w0.203: 12.5,16.2 12.5,17.2 13.812,18.512 17.888,18.512 18.25,18.15 U2.32
PA12/CAN_TX: U2.33 U3.1 | length 15.8
  Component Side w0.203: 10.1,9.4 11,10.3 11,14 12.951,15.951 12.951,17.051 14.056,18.156 17.444,18.156 17.75,17.85 U2.33
PA13/SWDIO: J1.2 U2.34 | length 9.5
  Component Side w0.254: v1(17.2,14.9) 17.25,14.95 U2.34
  Solder Side w0.254: v1(17.2,14.9) 17.904,15.604 17.904,17.116 17.762,17.258 17.762,19.362 19,20.6 J1.2
PA14/SWCLK: J1.4 U2.37 | length 13.7
  Component Side w0.203: v1(14.7,15.5) 14.7,14.775 U2.37
  Solder Side w0.254: v1(14.7,15.5) 16,14.2 17.5,14.2 18.31,15.01 18.31,18.117 18.168,18.259 18.168,19.194 19.274,20.3 20,20.3 20.27,20.57 J1.4
PA15: D5.2 P1.39 U2.38 | length 22.4
  Component Side w0.203: v2(12.8,14.7) 13.25,14.25 U2.38 ; v1(29.2,15.6) 30.1,15.6 30.2,15.5 P1.39
  Solder Side w0.203: v2(12.8,14.7) 13.778,13.722 18.099,13.722 18.821,13 24.726,13 27.326,15.6 v1(29.2,15.6)
PB0: P1.17 U2.18 | length 4.9
  Component Side w0.203: U2.18 24.45,11.75 25.7,13 P1.17
PB1: P1.16 U2.19 | length 4.9
  Component Side w0.203: U2.19 24.35,12.25 25.6,13.5 P1.16
PB2: P1.15 U2.20 | length 4.9
  Component Side w0.203: U2.20 24.25,12.75 25.5,14 P1.15
PB3: D4.2 P1.38 U2.39 | length 23.7
  Component Side w0.203: v2(12,14) 12.246,13.754 14.725,13.754 U2.39 ; v1(29.8,15) P1.38
  Solder Side w0.203: v2(12,14) 12.8,14 13.484,13.316 17.931,13.316 18.653,12.594 24.894,12.594 27.3,15 v1(29.8,15)
PB4: D3.2 P1.37 U2.40 | length 22.6
  Component Side w0.203: v2(12.4,13.2) 12.45,13.25 U2.40 ; v1(29.2,14.4) 30.1,14.4 30.2,14.5 P1.37
  Solder Side w0.203: v2(12.4,13.2) 12.69,12.91 17.762,12.91 18.485,12.188 26.475,12.188 28.688,14.4 v1(29.2,14.4)
PB5: D2.2 P1.36 U2.41 | length 23.5
  Component Side w0.203: v2(12,12.4) 13.1,12.4 13.45,12.75 U2.41 U2.41@14.675,12.8 ; v1(29.8,13.8) cw(c30.283,13.317) 30.283,14 P1.36
  Solder Side w0.203: v2(12,12.4) 13.118,12.4 13.222,12.504 17.594,12.504 18.316,11.781 26.775,11.781 28.794,13.8 v1(29.8,13.8)
PB6/USART1_TX: J1.6 P1.34 U2.42 | length 40.8
  Component Side w0.203: v2(12.4,11.6) 13.1,11.6 13.75,12.25 U2.42 cw(c14.604,12.371) U2.42@14.604,12.2 ; v1(29.2,13.2) 29.959,13.2 cw(c29.959,12.859) 30.2,13.1 ccw(c30.441,13.341) 30.441,13 P1.34
  Solder Side w0.254: v2(12.4,11.6) 12.892,11.6 13.39,12.098 17.426,12.098 18.148,11.375 26.975,11.375 28.8,13.2 v1(29.2,13.2) 30.194,13.2 30.594,13.6 30.594,18.006 28.8,19.8 21.9,19.8 21.54,20.16 J1.6
PB7/USART1_RX: J1.8 P1.33 U2.43 | length 42.9
  Component Side w0.203: v1(12,10.8) 12.9,10.8 13.85,11.75 U2.43 ; v1(29.8,12.6) 29.9,12.5 P1.33
  Solder Side w0.203: v1(12,10.8) 12.667,10.8 13.558,11.691 17.258,11.691 17.98,10.969 27.169,10.969 28.8,12.6 v1(29.8,12.6)
  Solder Side w0.254: J1.8 22.81,23.61 23.2,24 25.7,24 31,18.7 31,13 30.6,12.6 v1(29.8,12.6)
PB8/I2C1_SCL: P1.32 U2.45 | length 23
  Component Side w0.203: v1(12.4,10) 12.8,10 13.55,10.75 U2.45 ; v1(29.2,12) P1.32
  Solder Side w0.203: v1(12.4,10) 12.441,10 13.727,11.285 17.089,11.285 17.812,10.563 27.463,10.563 28.9,12 v1(29.2,12)
PB9/I2C1_SDA: P1.31 U2.46 | length 24.3
  Component Side w0.203: v1(12,9.2) 12.6,9.2 13.65,10.25 U2.46 ; v1(29.8,11.4) 29.9,11.5 P1.31
  Solder Side w0.203: v1(12,9.2) 12.6,9.2 12.956,9.556 12.956,9.941 13.895,10.879 15.105,10.879 15.128,10.857 15.372,10.857 15.395,10.879 16.921,10.879 17.643,10.157 27.857,10.157 28.956,11.256 29.656,11.256 v1(29.8,11.4)
PB10/USART3_TX/I2C2_SCL: P1.14 U2.21 | length 4.9
  Component Side w0.203: U2.21 24.152,13.25 25.402,14.5 P1.14
PB11/USART3_RX/I2C2_SDA: P1.13 U2.22 | length 4.9
  Component Side w0.203: U2.22 24.15,13.75 25.4,15 P1.13
PB12/SPI2_NSS: P1.11 U2.25 | length 6.1
  Component Side w0.203: U2.25 23.975,16.275 24.25,16 P1.11
PB13/SPI2_SCK: P1.10 U2.26 | length 7.9
  Component Side w0.203: U2.26 21.25,17.25 21.5,17.5 23.253,17.5 24.253,16.5 P1.10
PB14/SPI2_MISO: P1.9 U2.27 | length 8.5
  Component Side w0.203: U2.27 20.75,17.253 21.353,17.855 23.645,17.855 24.5,17 P1.9
PB15/SPI2_MOSI: P1.8 U2.28 | length 9.1
  Component Side w0.203: U2.28 20.25,17.255 21.206,18.211 24.039,18.211 24.75,17.5 P1.8
PC13: P1.30 U2.2 | length 20.1
  Component Side w0.203: v1(15.8,5.7) 16.75,6.65 U2.2 ; v1(29.2,10.7) 29.8,10.7 ccw(c29.8,11.183) 30.141,10.841 30.2,10.9 cw(c30.442,10.659) 30.442,11 P1.30
  Solder Side w0.203: v1(15.8,5.7) 24.2,5.7 v1(29.2,10.7)
PC14/OSC32_IN: C19.2 U2.3 Y1.1 | length 12.5
  Component Side w0.203: Y1.1 11,2 10.6,2.4 10.6,3.525 C19.2 12.829,4.246 15.146,4.246 17.25,6.35 U2.3
PC15/OSC32_OUT: C20.2 U2.4 Y1.3 | length 7.3
  Component Side w0.203: Y1.3 13.825,3.175 C20.2 15.5,4 17.75,6.25 U2.4
PF0/OSC_IN: C21.2 U2.5 Y2.1 | length 6.8
  Component Side w0.203: U2.5 18.25,6.425 C21.2 19.675,2.875 19.3,2.5 Y2.1
PF1/OSC_OUT: C22.2 U2.6 Y2.2 | length 9.1
  Component Side w0.203: U2.6 18.75,6.55 19.546,5.754 20.421,5.754 C22.2 22.325,2.5 Y2.2
SS: C4.1 U1.10 | length 5.2
  Component Side w0.254: U1.10 17,23.5 17.25,23.25 17.25,22.075 C4.1
SW: C5.2 L2.1 U1.4
pads on no net: J1.7 J1.9 P1. P1.12 P1.35 P1.46 P2. P3. U3.5 U3.8

## Polygon pours and split planes (outlines as drawn)
SW on Component Side "SW" (solid, pour order 6): 15.65,26.4 15.65,29.5 9.75,29.5 9.75,23.3 12.3,23.3 14.5,25.5 14.5,26.4
3V3 on Component Side "3V3_TOP" (solid, pour order 10): 0.5,29.5 9.5,29.5 9.5,23 11,23 11,21 0.5,21
12V on Component Side "12V" (solid, pour order 14): 34.5,19.25 29.5,19.25 29.5,22 22.5,22 22.5,25 24,25 24,27.5 25.5,27.5 25.5,25 34.5,25
GND on Component Side "TOP_GND_1" (solid, pour order 8): 29.5,22 22.25,22 22.25,26.25 17.25,26.25 17.25,27.189 11.25,27.189 11.25,20.75 0.5,20.75 0.5,14.5 9.5,14.5 10.4,14.5 11.25,15.35 14.65,18.75 26.25,18.75 26.75,19.25 29.5,19.25
12V_IN on Component Side "12V_IN" (solid, pour order 16): 34.5,25 22.25,25 22.25,26.25 15.75,26.25 15.75,29.5 34.5,29.5
no net on Ground Plane (split plane): 34.49,0.51 0.51,0.51 0.51,29.49 34.49,29.49
no net on Power Plane (split plane): 34.49,0.51 0.51,0.51 0.51,29.49 34.49,29.49